# Altium PCB PCB1.PcbDoc (part 2 of 2)
Units mm, origin at the board's own origin, x right, y up, seen from the top; angles counter-clockwise.
Board outline 143.92 x 105.38 mm, 2 copper layers (Top Layer, Bottom Layer); 71 components, 60 nets, 252 pads, 1765 vias.
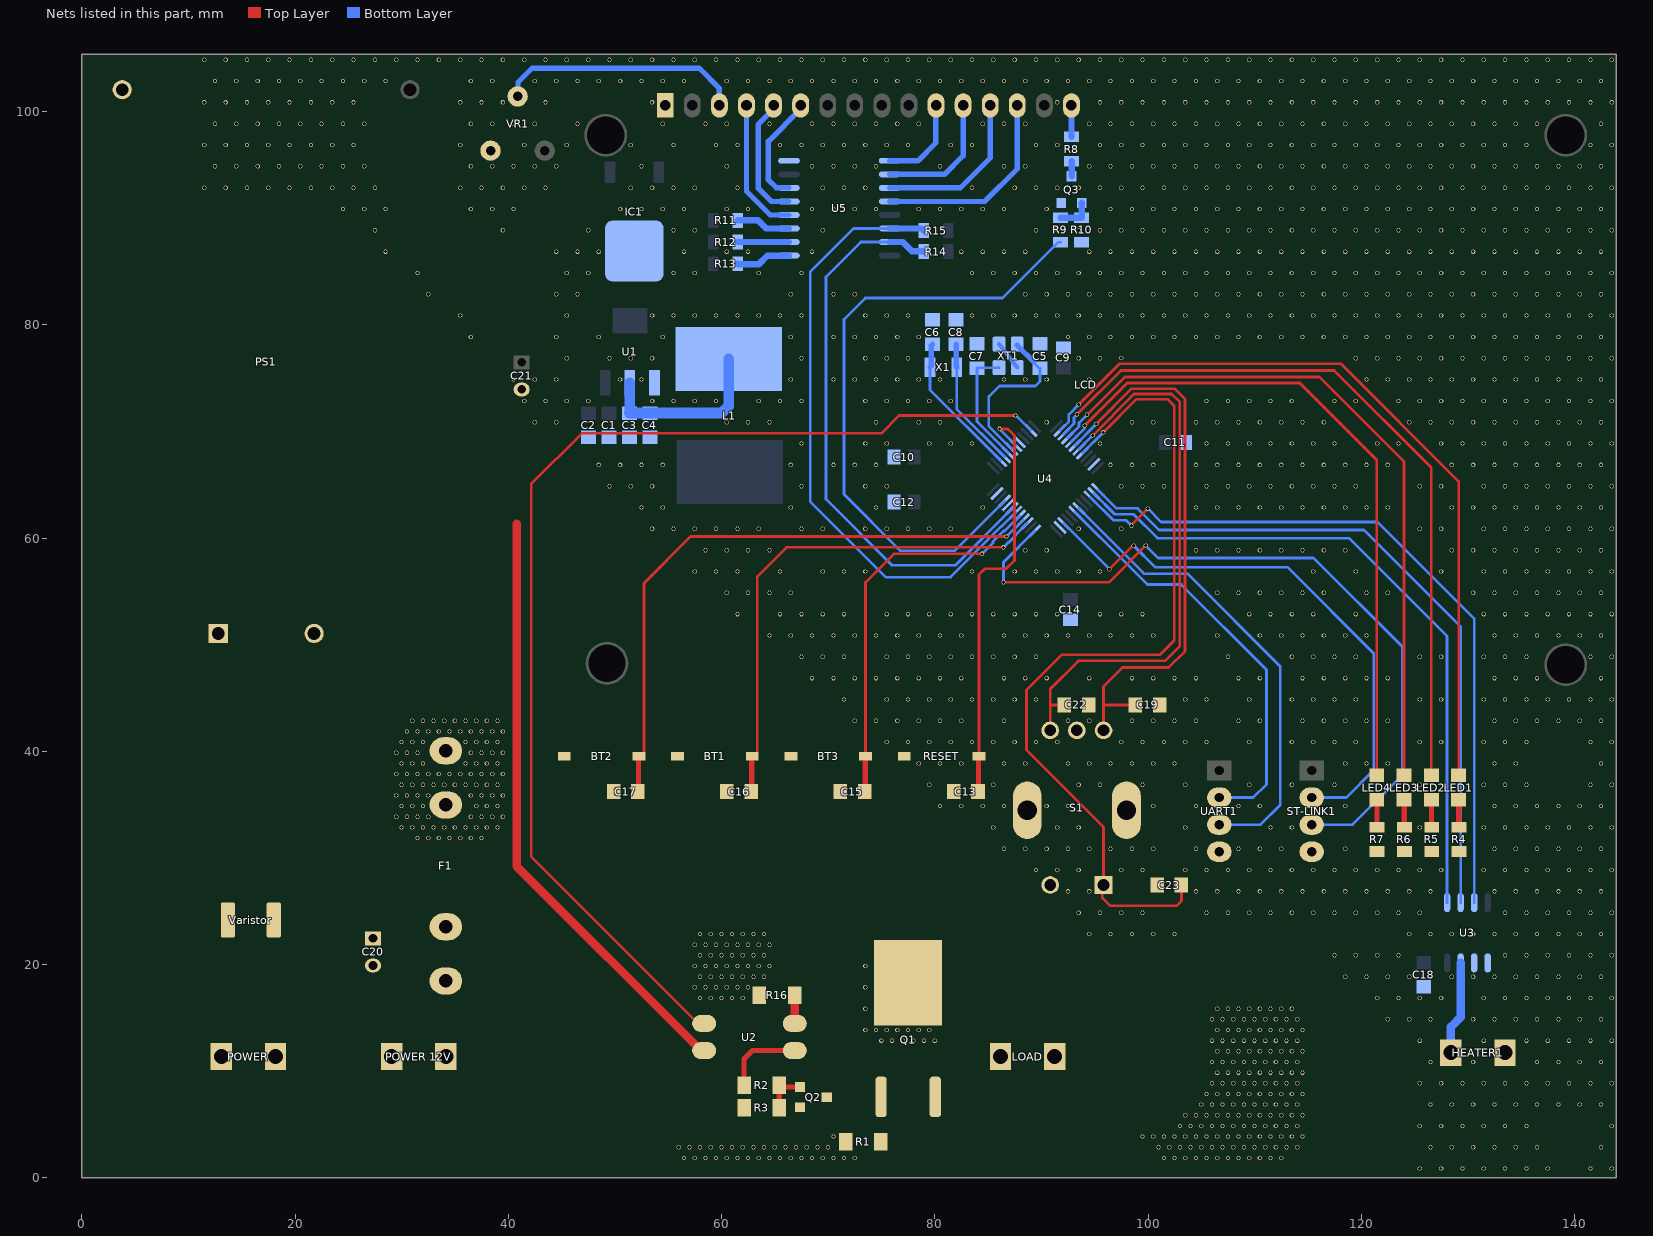
[diagram p2: the nets of this part, all layers, seen from the top]

## Via types
v1: diameter 0.4, hole 0.3, Top Layer to Bottom Layer, tented both sides, 1762 vias
v2: diameter 4, hole 3.5, Top Layer to Bottom Layer, 3 vias

## Nets (pads, with @x,y where several pads share a name; then routed paths per layer and width w, separated by ;. In a path a pad name is that pad's centre, name@x,y a point inside that pad or via, vN(x,y) a via of type N, cw(c..) or ccw(c..) an arc to the next point about the centre after c; other vN are vias at no path point) (continued)
GND: BT1.2 BT2.2 BT3.2 C1.2 C2.2 C3.2 C4.2 C5.2 C6.2 C7.2 C8.2 C9.1 C10.1 C11.1 C12.1 C13.1 C14.1 C15.1 C16.1 C17.1 C18.1 C19.2 C21.2 C22.2 C23.2 HEATER1.1 IC1.2 LCD.1 PS1.3 Q3.1 R4.2 R5.2 R6.2 R7.2 R10.1 RESET.2 S1.2 S1.C S1.S1 S1.S2 ST-LINK1.4 U1.1 U2.2 U3.1 U3.2 U4.8 U4.23 U4.35 U4.44 U4.47 U5.8 UART1.4 VR1.1 XT1.2 XT1.4 | length 56.8
  Top Layer w0.254: U2.2@58.064,11.938 U2.2@58.361,11.938
  Top Layer w0.8: 40.792,61.326 40.792,29.21 U2.2@58.064,11.938
  other v1: 125.483,0.867 127.483,0.867 129.483,0.867 131.483,0.867 133.483,0.867 135.483,0.867 137.483,0.867 141.483,0.867 143.483,0.867 126.483,2.867 128.483,2.867 130.483,2.867 132.483,2.867 134.483,2.867 136.483,2.867 142.483,2.867 125.483,4.867 127.483,4.867 129.483,4.867 131.483,4.867 133.483,4.867 135.483,4.867 143.483,4.867 126.483,6.867 128.483,6.867 130.483,6.867 132.483,6.867 134.483,6.867 136.483,6.867 138.483,6.867 140.483,6.867 142.483,6.867 125.483,8.867 127.483,8.867 129.483,8.867 131.483,8.867 133.483,8.867 135.483,8.867 137.483,8.867 139.483,8.867 141.483,8.867 143.483,8.867 126.483,10.867 130.483,10.867 136.483,10.867 138.483,10.867 140.483,10.867 142.483,10.867 125.483,12.867 131.483,12.867 135.483,12.867 137.483,12.867 139.483,12.867 141.483,12.867 143.483,12.867 122.483,14.867 124.483,14.867 126.483,14.867 130.483,14.867 132.483,14.867 134.483,14.867 136.483,14.867 138.483,14.867 140.483,14.867 142.483,14.867 121.483,16.867 123.483,16.867 125.483,16.867 127.483,16.867 131.483,16.867 133.483,16.867 135.483,16.867 137.483,16.867 139.483,16.867 141.483,16.867 143.483,16.867 118.483,18.867 120.483,18.867 122.483,18.867 124.483,18.867 128.483,18.867 130.483,18.867 132.483,18.867 134.483,18.867 136.483,18.867 138.483,18.867 140.483,18.867 142.483,18.867 117.483,20.867 119.483,20.867 121.483,20.867 123.483,20.867 133.483,20.867 135.483,20.867 137.483,20.867 139.483,20.867 141.483,20.867 143.483,20.867 94.483,22.867 96.483,22.867 98.483,22.867 100.483,22.867 102.483,22.867 124.483,22.867 126.483,22.867 128.483,22.867 130.483,22.867 132.483,22.867 134.483,22.867 136.483,22.867 138.483,22.867 140.483,22.867 142.483,22.867 93.483,24.867 95.483,24.867 97.483,24.867 99.483,24.867 105.483,24.867 107.483,24.867 109.483,24.867 111.483,24.867 113.483,24.867 115.483,24.867 117.483,24.867 119.483,24.867 121.483,24.867 123.483,24.867 125.483,24.867 133.483,24.867 135.483,24.867 137.483,24.867 139.483,24.867 141.483,24.867 143.483,24.867 92.483,26.867 94.483,26.867 104.483,26.867 106.483,26.867 108.483,26.867 110.483,26.867 112.483,26.867 114.483,26.867 116.483,26.867 118.483,26.867 120.483,26.867 122.483,26.867 124.483,26.867 126.483,26.867 132.483,26.867 134.483,26.867 136.483,26.867 138.483,26.867 140.483,26.867 142.483,26.867 89.483,28.867 91.483,28.867 93.483,28.867 97.483,28.867 99.483,28.867 103.483,28.867 105.483,28.867 107.483,28.867 109.483,28.867 111.483,28.867 113.483,28.867 115.483,28.867 117.483,28.867 119.483,28.867 121.483,28.867 123.483,28.867 125.483,28.867 127.483,28.867 131.483,28.867 133.483,28.867 135.483,28.867 137.483,28.867 139.483,28.867 141.483,28.867 143.483,28.867 86.483,30.867 88.483,30.867 90.483,30.867 92.483,30.867 94.483,30.867 96.483,30.867 98.483,30.867 100.483,30.867 104.483,30.867 108.483,30.867 110.483,30.867 112.483,30.867 118.483,30.867 132.483,30.867 134.483,30.867 136.483,30.867 138.483,30.867 140.483,30.867 142.483,30.867 85.483,32.867 91.483,32.867 93.483,32.867 103.483,32.867 111.483,32.867 113.483,32.867 125.483,32.867 131.483,32.867 133.483,32.867 135.483,32.867 137.483,32.867 139.483,32.867 141.483,32.867 143.483,32.867 80.483,34.867 82.483,34.867 84.483,34.867 86.483,34.867 90.483,34.867 92.483,34.867 100.483,34.867 104.483,34.867 108.483,34.867 110.483,34.867 118.483,34.867 132.483,34.867 134.483,34.867 136.483,34.867 138.483,34.867 140.483,34.867 142.483,34.867 79.483,36.867 85.483,36.867 93.483,36.867 95.483,36.867 99.483,36.867 103.483,36.867 109.483,36.867 113.483,36.867 117.483,36.867 125.483,36.867 131.483,36.867 133.483,36.867 135.483,36.867 141.483,36.867 143.483,36.867 78.483,38.867 80.483,38.867 82.483,38.867 86.483,38.867 88.483,38.867 92.483,38.867 94.483,38.867 96.483,38.867 98.483,38.867 100.483,38.867 102.483,38.867 118.483,38.867 120.483,38.867 122.483,38.867 132.483,38.867 134.483,38.867 142.483,38.867 75.483,40.867 77.483,40.867 79.483,40.867 81.483,40.867 83.483,40.867 85.483,40.867 87.483,40.867 89.483,40.867 91.483,40.867 97.483,40.867 99.483,40.867 101.483,40.867 103.483,40.867 105.483,40.867 109.483,40.867 113.483,40.867 115.483,40.867 117.483,40.867 119.483,40.867 125.483,40.867 127.483,40.867 131.483,40.867 133.483,40.867 135.483,40.867 141.483,40.867 143.483,40.867 72.483,42.867 74.483,42.867 76.483,42.867 78.483,42.867 80.483,42.867 82.483,42.867 86.483,42.867 92.483,42.867 94.483,42.867 98.483,42.867 100.483,42.867 102.483,42.867 104.483,42.867 108.483,42.867 110.483,42.867 114.483,42.867 116.483,42.867 118.483,42.867 120.483,42.867 122.483,42.867 132.483,42.867 134.483,42.867 136.483,42.867 138.483,42.867 140.483,42.867 142.483,42.867 71.483,44.867 75.483,44.867 77.483,44.867 79.483,44.867 81.483,44.867 83.483,44.867 85.483,44.867 87.483,44.867 89.483,44.867 103.483,44.867 105.483,44.867 109.483,44.867 113.483,44.867 115.483,44.867 117.483,44.867 119.483,44.867 125.483,44.867 127.483,44.867 131.483,44.867 133.483,44.867 135.483,44.867 137.483,44.867 139.483,44.867 141.483,44.867 143.483,44.867 68.483,46.867 70.483,46.867 72.483,46.867 74.483,46.867 76.483,46.867 78.483,46.867 80.483,46.867 82.483,46.867 86.483,46.867 88.483,46.867 90.483,46.867 94.483,46.867 98.483,46.867 100.483,46.867 102.483,46.867 104.483,46.867 108.483,46.867 110.483,46.867 114.483,46.867 116.483,46.867 118.483,46.867 120.483,46.867 122.483,46.867 132.483,46.867 134.483,46.867 136.483,46.867 142.483,46.867 67.483,48.867 69.483,48.867 71.483,48.867 75.483,48.867 77.483,48.867 79.483,48.867 81.483,48.867 83.483,48.867 85.483,48.867 87.483,48.867 89.483,48.867 107.483,48.867 113.483,48.867 115.483,48.867 117.483,48.867 119.483,48.867 125.483,48.867 127.483,48.867 131.483,48.867 133.483,48.867 135.483,48.867 141.483,48.867 143.483,48.867 64.483,50.867 66.483,50.867 68.483,50.867 70.483,50.867 72.483,50.867 74.483,50.867 76.483,50.867 78.483,50.867 80.483,50.867 82.483,50.867 86.483,50.867 88.483,50.867 90.483,50.867 92.483,50.867 94.483,50.867 96.483,50.867 98.483,50.867 100.483,50.867 106.483,50.867 110.483,50.867 112.483,50.867 114.483,50.867 116.483,50.867 118.483,50.867 120.483,50.867 132.483,50.867 134.483,50.867 136.483,50.867 138.483,50.867 140.483,50.867 142.483,50.867 61.483,52.867 65.483,52.867 67.483,52.867 69.483,52.867 71.483,52.867 75.483,52.867 77.483,52.867 79.483,52.867 81.483,52.867 83.483,52.867 85.483,52.867 87.483,52.867 89.483,52.867 91.483,52.867 95.483,52.867 97.483,52.867 99.483,52.867 109.483,52.867 111.483,52.867 113.483,52.867 115.483,52.867 119.483,52.867 131.483,52.867 133.483,52.867 135.483,52.867 137.483,52.867 139.483,52.867 141.483,52.867 143.483,52.867 60.483,54.867 62.483,54.867 64.483,54.867 66.483,54.867 106.483,54.867 108.483,54.867 110.483,54.867 112.483,54.867 114.483,54.867 116.483,54.867 120.483,54.867 122.483,54.867 130.483,54.867 132.483,54.867 134.483,54.867 136.483,54.867 138.483,54.867 140.483,54.867 142.483,54.867 57.483,56.867 59.483,56.867 61.483,56.867 65.483,56.867 69.483,56.867 71.483,56.867 73.483,56.867 83.483,56.867 87.483,56.867 89.483,56.867 91.483,56.867 93.483,56.867 95.483,56.867 115.483,56.867 119.483,56.867 127.483,56.867 131.483,56.867 133.483,56.867 135.483,56.867 137.483,56.867 139.483,56.867 141.483,56.867 143.483,56.867 58.483,58.867 60.483,58.867 62.483,58.867 64.483,58.867 88.483,58.867 90.483,58.867 104.483,58.867 106.483,58.867 108.483,58.867 110.483,58.867 112.483,58.867 114.483,58.867 116.483,58.867 118.483,58.867 128.483,58.867 130.483,58.867 132.483,58.867 134.483,58.867 136.483,58.867 138.483,58.867 140.483,58.867 142.483,58.867 53.483,60.867 55.483,60.867 57.483,60.867 59.483,60.867 61.483,60.867 63.483,60.867 67.483,60.867 69.483,60.867 73.483,60.867 75.483,60.867 77.483,60.867 79.483,60.867 81.483,60.867 93.483,60.867 97.483,60.867 125.483,60.867 127.483,60.867 131.483,60.867 133.483,60.867 135.483,60.867 137.483,60.867 139.483,60.867 141.483,60.867 143.483,60.867 52.483,62.867 54.483,62.867 66.483,62.867 74.483,62.867 84.483,62.867 104.483,62.867 106.483,62.867 108.483,62.867 110.483,62.867 112.483,62.867 114.483,62.867 116.483,62.867 118.483,62.867 120.483,62.867 122.483,62.867 128.483,62.867 130.483,62.867 132.483,62.867 134.483,62.867 136.483,62.867 138.483,62.867 140.483,62.867 142.483,62.867 49.483,64.867 51.483,64.867 53.483,64.867 67.483,64.867 73.483,64.867 75.483,64.867 97.483,64.867 99.483,64.867 101.483,64.867 105.483,64.867 107.483,64.867 109.483,64.867 111.483,64.867 113.483,64.867 115.483,64.867 117.483,64.867 119.483,64.867 125.483,64.867 127.483,64.867 131.483,64.867 133.483,64.867 135.483,64.867 137.483,64.867 139.483,64.867 141.483,64.867 143.483,64.867 48.483,66.867 50.483,66.867 52.483,66.867 54.483,66.867 66.483,66.867 70.483,66.867 72.483,66.867 74.483,66.867 96.483,66.867 98.483,66.867 100.483,66.867 104.483,66.867 106.483,66.867 108.483,66.867 110.483,66.867 112.483,66.867 114.483,66.867 116.483,66.867 118.483,66.867 120.483,66.867 122.483,66.867 128.483,66.867 130.483,66.867 132.483,66.867 134.483,66.867 136.483,66.867 138.483,66.867 140.483,66.867 142.483,66.867 67.483,68.867 73.483,68.867 75.483,68.867 79.483,68.867 81.483,68.867 83.483,68.867 95.483,68.867 105.483,68.867 107.483,68.867 109.483,68.867 111.483,68.867 113.483,68.867 115.483,68.867 117.483,68.867 121.483,68.867 123.483,68.867 127.483,68.867 129.483,68.867 131.483,68.867 133.483,68.867 135.483,68.867 137.483,68.867 139.483,68.867 141.483,68.867 143.483,68.867 42.483,70.867 44.483,70.867 60.483,70.867 62.483,70.867 64.483,70.867 74.483,70.867 78.483,70.867 80.483,70.867 90.483,70.867 98.483,70.867 100.483,70.867 104.483,70.867 106.483,70.867 108.483,70.867 110.483,70.867 112.483,70.867 114.483,70.867 116.483,70.867 124.483,70.867 126.483,70.867 128.483,70.867 130.483,70.867 132.483,70.867 134.483,70.867 136.483,70.867 138.483,70.867 140.483,70.867 142.483,70.867 41.483,72.867 43.483,72.867 45.483,72.867 47.483,72.867 53.483,72.867 55.483,72.867 57.483,72.867 59.483,72.867 63.483,72.867 65.483,72.867 67.483,72.867 73.483,72.867 75.483,72.867 77.483,72.867 79.483,72.867 81.483,72.867 105.483,72.867 107.483,72.867 109.483,72.867 111.483,72.867 113.483,72.867 117.483,72.867 119.483,72.867 123.483,72.867 125.483,72.867 127.483,72.867 129.483,72.867 131.483,72.867 133.483,72.867 135.483,72.867 137.483,72.867 139.483,72.867 141.483,72.867 143.483,72.867 40.483,74.867 42.483,74.867 44.483,74.867 50.483,74.867 52.483,74.867 66.483,74.867 70.483,74.867 72.483,74.867 74.483,74.867 76.483,74.867 78.483,74.867 80.483,74.867 86.483,74.867 88.483,74.867 90.483,74.867 94.483,74.867 120.483,74.867 122.483,74.867 124.483,74.867 126.483,74.867 128.483,74.867 130.483,74.867 132.483,74.867 134.483,74.867 136.483,74.867 138.483,74.867 140.483,74.867 142.483,74.867 45.483,76.867 49.483,76.867 51.483,76.867 53.483,76.867 67.483,76.867 73.483,76.867 75.483,76.867 77.483,76.867 93.483,76.867 95.483,76.867 119.483,76.867 121.483,76.867 123.483,76.867 125.483,76.867 127.483,76.867 129.483,76.867 131.483,76.867 133.483,76.867 135.483,76.867 137.483,76.867 139.483,76.867 141.483,76.867 143.483,76.867 97.483,76.889 36.483,78.867 44.483,78.867 48.483,78.867 54.483,78.867 66.483,78.867 70.483,78.867 72.483,78.867 74.483,78.867 76.483,78.867 78.483,78.867 92.483,78.867 94.483,78.867 96.483,78.867 98.483,78.867 100.483,78.867 102.483,78.867 104.483,78.867 106.483,78.867 108.483,78.867 110.483,78.867 112.483,78.867 114.483,78.867 116.483,78.867 118.483,78.867 120.483,78.867 122.483,78.867 124.483,78.867 126.483,78.867 128.483,78.867 130.483,78.867 132.483,78.867 134.483,78.867 136.483,78.867 138.483,78.867 140.483,78.867 142.483,78.867 35.483,80.867 45.483,80.867 53.483,80.867 55.483,80.867 57.483,80.867 59.483,80.867 61.483,80.867 63.483,80.867 65.483,80.867 67.483,80.867 73.483,80.867 75.483,80.867 77.483,80.867 83.483,80.867 85.483,80.867 87.483,80.867 89.483,80.867 91.483,80.867 93.483,80.867 95.483,80.867 97.483,80.867 99.483,80.867 101.483,80.867 103.483,80.867 105.483,80.867 107.483,80.867 109.483,80.867 111.483,80.867 113.483,80.867 115.483,80.867 117.483,80.867 119.483,80.867 121.483,80.867 123.483,80.867 125.483,80.867 127.483,80.867 129.483,80.867 131.483,80.867 133.483,80.867 135.483,80.867 137.483,80.867 139.483,80.867 141.483,80.867 143.483,80.867 32.483,82.867 44.483,82.867 46.483,82.867 66.483,82.867 70.483,82.867 72.483,82.867 88.483,82.867 90.483,82.867 92.483,82.867 94.483,82.867 96.483,82.867 98.483,82.867 100.483,82.867 102.483,82.867 104.483,82.867 106.483,82.867 108.483,82.867 110.483,82.867 112.483,82.867 114.483,82.867 116.483,82.867 118.483,82.867 120.483,82.867 122.483,82.867 124.483,82.867 126.483,82.867 128.483,82.867 130.483,82.867 132.483,82.867 134.483,82.867 136.483,82.867 138.483,82.867 140.483,82.867 142.483,82.867 31.483,84.867 45.483,84.867 47.483,84.867 55.483,84.867 57.483,84.867 63.483,84.867 67.483,84.867 83.483,84.867 85.483,84.867 87.483,84.867 89.483,84.867 91.483,84.867 93.483,84.867 95.483,84.867 97.483,84.867 99.483,84.867 101.483,84.867 103.483,84.867 105.483,84.867 107.483,84.867 109.483,84.867 111.483,84.867 113.483,84.867 115.483,84.867 117.483,84.867 119.483,84.867 121.483,84.867 123.483,84.867 125.483,84.867 127.483,84.867 129.483,84.867 131.483,84.867 133.483,84.867 135.483,84.867 137.483,84.867 139.483,84.867 141.483,84.867 143.483,84.867 28.483,86.867 44.483,86.867 46.483,86.867 48.483,86.867 56.483,86.867 60.483,86.867 62.483,86.867 68.483,86.867 82.483,86.867 84.483,86.867 86.483,86.867 88.483,86.867 94.483,86.867 96.483,86.867 98.483,86.867 100.483,86.867 102.483,86.867 104.483,86.867 106.483,86.867 108.483,86.867 110.483,86.867 112.483,86.867 114.483,86.867 116.483,86.867 118.483,86.867 120.483,86.867 122.483,86.867 124.483,86.867 126.483,86.867 128.483,86.867 130.483,86.867 132.483,86.867 134.483,86.867 136.483,86.867 138.483,86.867 140.483,86.867 142.483,86.867 27.483,88.867 39.483,88.867 47.483,88.867 55.483,88.867 57.483,88.867 69.483,88.867 89.483,88.867 91.483,88.867 93.483,88.867 95.483,88.867 97.483,88.867 99.483,88.867 101.483,88.867 103.483,88.867 105.483,88.867 107.483,88.867 109.483,88.867 111.483,88.867 113.483,88.867 115.483,88.867 117.483,88.867 119.483,88.867 121.483,88.867 123.483,88.867 125.483,88.867 127.483,88.867 129.483,88.867 131.483,88.867 133.483,88.867 135.483,88.867 137.483,88.867 139.483,88.867 141.483,88.867 143.483,88.867 24.483,90.867 26.483,90.867 28.483,90.867 36.483,90.867 38.483,90.867 40.483,90.867 50.483,90.867 52.483,90.867 54.483,90.867 56.483,90.867 60.483,90.867 62.483,90.867 68.483,90.867 70.483,90.867 72.483,90.867 74.483,90.867 78.483,90.867 80.483,90.867 82.483,90.867 84.483,90.867 86.483,90.867 90.483,90.867 96.483,90.867 98.483,90.867 100.483,90.867 102.483,90.867 104.483,90.867 106.483,90.867 108.483,90.867 110.483,90.867 112.483,90.867 114.483,90.867 116.483,90.867 118.483,90.867 120.483,90.867 122.483,90.867 124.483,90.867 126.483,90.867 128.483,90.867 130.483,90.867 132.483,90.867 134.483,90.867 136.483,90.867 138.483,90.867 140.483,90.867 142.483,90.867 11.483,92.867 13.483,92.867 15.483,92.867 17.483,92.867 19.483,92.867 21.483,92.867 23.483,92.867 25.483,92.867 27.483,92.867 35.483,92.867 37.483,92.867 39.483,92.867 41.483,92.867 43.483,92.867 51.483,92.867 53.483,92.867 55.483,92.867 57.483,92.867 61.483,92.867 69.483,92.867 71.483,92.867 73.483,92.867 83.483,92.867 87.483,92.867 89.483,92.867 91.483,92.867 93.483,92.867 95.483,92.867 97.483,92.867 99.483,92.867 101.483,92.867 103.483,92.867 105.483,92.867 107.483,92.867 109.483,92.867 111.483,92.867 113.483,92.867 115.483,92.867 117.483,92.867 119.483,92.867 121.483,92.867 123.483,92.867 125.483,92.867 127.483,92.867 129.483,92.867 131.483,92.867 133.483,92.867 135.483,92.867 137.483,92.867 139.483,92.867 141.483,92.867 143.483,92.867 12.483,94.867 14.483,94.867 16.483,94.867 18.483,94.867 20.483,94.867 22.483,94.867 24.483,94.867 26.483,94.867 36.483,94.867 38.483,94.867 40.483,94.867 42.483,94.867 44.483,94.867 52.483,94.867 60.483,94.867 68.483,94.867 70.483,94.867 72.483,94.867 74.483,94.867 80.483,94.867 86.483,94.867 88.483,94.867 94.483,94.867 96.483,94.867 98.483,94.867 100.483,94.867 102.483,94.867 104.483,94.867 106.483,94.867 108.483,94.867 110.483,94.867 112.483,94.867 114.483,94.867 116.483,94.867 118.483,94.867 120.483,94.867 122.483,94.867 124.483,94.867 126.483,94.867 128.483,94.867 130.483,94.867 132.483,94.867 134.483,94.867 136.483,94.867 138.483,94.867 140.483,94.867 142.483,94.867 11.483,96.867 13.483,96.867 15.483,96.867 17.483,96.867 19.483,96.867 21.483,96.867 23.483,96.867 25.483,96.867 35.483,96.867 41.483,96.867 45.483,96.867 51.483,96.867 55.483,96.867 59.483,96.867 61.483,96.867 65.483,96.867 67.483,96.867 69.483,96.867 71.483,96.867 73.483,96.867 75.483,96.867 77.483,96.867 81.483,96.867 83.483,96.867 89.483,96.867 91.483,96.867 95.483,96.867 97.483,96.867 99.483,96.867 101.483,96.867 103.483,96.867 105.483,96.867 107.483,96.867 109.483,96.867 111.483,96.867 113.483,96.867 115.483,96.867 117.483,96.867 119.483,96.867 121.483,96.867 123.483,96.867 125.483,96.867 127.483,96.867 129.483,96.867 131.483,96.867 133.483,96.867 135.483,96.867 141.483,96.867 143.483,96.867 12.483,98.867 14.483,98.867 16.483,98.867 18.483,98.867 20.483,98.867 22.483,98.867 24.483,98.867 26.483,98.867 36.483,98.867 38.483,98.867 40.483,98.867 42.483,98.867 46.483,98.867 54.483,98.867 58.483,98.867 60.483,98.867 64.483,98.867 68.483,98.867 70.483,98.867 72.483,98.867 74.483,98.867 76.483,98.867 78.483,98.867 84.483,98.867 86.483,98.867 88.483,98.867 94.483,98.867 96.483,98.867 98.483,98.867 100.483,98.867 102.483,98.867 104.483,98.867 106.483,98.867 108.483,98.867 110.483,98.867 112.483,98.867 114.483,98.867 116.483,98.867 118.483,98.867 120.483,98.867 122.483,98.867 124.483,98.867 126.483,98.867 128.483,98.867 130.483,98.867 132.483,98.867 134.483,98.867 136.483,98.867 142.483,98.867 11.483,100.867 13.483,100.867 15.483,100.867 17.483,100.867 19.483,100.867 21.483,100.867 23.483,100.867 25.483,100.867 35.483,100.867 37.483,100.867 39.483,100.867 43.483,100.867 53.483,100.867 91.483,100.867 95.483,100.867 97.483,100.867 99.483,100.867 101.483,100.867 103.483,100.867 105.483,100.867 107.483,100.867 109.483,100.867 111.483,100.867 113.483,100.867 115.483,100.867 117.483,100.867 119.483,100.867 121.483,100.867 123.483,100.867 125.483,100.867 127.483,100.867 129.483,100.867 131.483,100.867 133.483,100.867 135.483,100.867 137.483,100.867 139.483,100.867 141.483,100.867 143.483,100.867 12.483,102.867 14.483,102.867 16.483,102.867 18.483,102.867 20.483,102.867 22.483,102.867 24.483,102.867 26.483,102.867 28.483,102.867 36.483,102.867 38.483,102.867 42.483,102.867 44.483,102.867 46.483,102.867 48.483,102.867 50.483,102.867 52.483,102.867 54.483,102.867 56.483,102.867 60.483,102.867 62.483,102.867 64.483,102.867 66.483,102.867 68.483,102.867 70.483,102.867 72.483,102.867 74.483,102.867 76.483,102.867 78.483,102.867 80.483,102.867 82.483,102.867 84.483,102.867 86.483,102.867 88.483,102.867 90.483,102.867 92.483,102.867 94.483,102.867 96.483,102.867 98.483,102.867 100.483,102.867 102.483,102.867 104.483,102.867 106.483,102.867 108.483,102.867 110.483,102.867 112.483,102.867 114.483,102.867 116.483,102.867 118.483,102.867 120.483,102.867 122.483,102.867 124.483,102.867 126.483,102.867 128.483,102.867 130.483,102.867 132.483,102.867 134.483,102.867 136.483,102.867 138.483,102.867 140.483,102.867 142.483,102.867 11.483,104.867 13.483,104.867 15.483,104.867 17.483,104.867 19.483,104.867 21.483,104.867 23.483,104.867 25.483,104.867 27.483,104.867 29.483,104.867 31.483,104.867 33.483,104.867 35.483,104.867 37.483,104.867 39.483,104.867 41.483,104.867 43.483,104.867 45.483,104.867 47.483,104.867 49.483,104.867 51.483,104.867 53.483,104.867 55.483,104.867 57.483,104.867 59.483,104.867 61.483,104.867 63.483,104.867 65.483,104.867 67.483,104.867 69.483,104.867 71.483,104.867 73.483,104.867 75.483,104.867 77.483,104.867 79.483,104.867 81.483,104.867 83.483,104.867 85.483,104.867 87.483,104.867 89.483,104.867 91.483,104.867 93.483,104.867 95.483,104.867 97.483,104.867 99.483,104.867 101.483,104.867 103.483,104.867 105.483,104.867 107.483,104.867 109.483,104.867 111.483,104.867 113.483,104.867 115.483,104.867 117.483,104.867 119.483,104.867 121.483,104.867 123.483,104.867 125.483,104.867 127.483,104.867 129.483,104.867 131.483,104.867 133.483,104.867 135.483,104.867 137.483,104.867 139.483,104.867 141.483,104.867 143.483,104.867
GND_ISO: "POWER 12V.2" C20.2 LOAD.1 Q2.1 R3.2
L: POWER.1 PS1.1 Varistor.2
N: POWER.2 PS1.2 Varistor.1
NetBT1_1: BT1.1 C16.2 U4.39 | length 47.9
  Top Layer w0.254: BT1.1@62.873,39.522 63.073,39.522 63.346,39.795 63.346,56.387 66.091,59.131 v1(86.436,59.131)
  Top Layer w0.5: C16.2@62.785,36.22 62.829,36.264 62.829,39.479 BT1.1@62.873,39.522
  Bottom Layer w0.254: v1(86.436,59.131) 86.915,59.61 86.938,59.61 87.57,60.242 87.57,60.28 U4.39@88.655,61.364
NetBT2_1: BT2.1 C17.2 U4.40 | length 57.9
  Top Layer w0.254: BT2.1@52.243,39.522 52.443,39.522 52.716,39.795 52.716,55.764 57.099,60.147 v1(86.716,60.147)
  Top Layer w0.5: C17.2@52.155,36.22 52.199,36.264 52.199,39.479 BT2.1@52.243,39.522
  Bottom Layer w0.254: v1(86.716,60.147) 86.736,60.147 88.301,61.713 U4.40@88.301,61.718
NetBT3_1: BT3.1 C15.2 U4.41 | length 36.8
  Top Layer w0.254: BT3.1@73.504,39.522 73.504,55.851 76.174,58.521 v1(84.422,58.521)
  Top Layer w0.5: C15.2@73.416,36.22 73.46,36.264 73.46,39.479 BT3.1@73.504,39.522
  Bottom Layer w0.254: v1(84.422,58.521) 85.447,59.546 85.447,59.661 86.444,60.658 86.534,60.658 U4.41@87.948,62.071
NetC3_1: C3.1 C4.1 L1.2 U1.2 | length 16.8
  Bottom Layer w0.254: C3.1@51.364,71.73 C3.1@51.398,71.763
  Bottom Layer w1: C3.1@51.364,71.73 C4.1@53.281,71.73 59.995,71.73 60.657,72.392 L1.2@60.657,76.792 ; C3.1@51.398,71.763 U1.2@51.398,74.574
NetC5_1: C5.1 U4.6 XT1.3 | length 15.7
  Bottom Layer w0.254: U4.6@87.241,68.336 87.222,68.336 86.728,68.831 86.719,68.831 85.065,70.485 85.065,73.279 86.055,74.27 89.433,74.27 89.865,74.701 C5.1@89.865,75.921 89.802,75.921 89.294,76.429 C5.1@89.294,76.513 ; XT1.3@87.718,78.089 XT1.3@87.718,78.189
  Bottom Layer w0.5: XT1.3@87.718,78.089 C5.1@89.294,76.513
NetC6_1: C6.1 U4.3 X1.2 | length 13.7
  Bottom Layer w0.254: X1.2@79.547,76.022 79.547,73.908 U4.3@86.18,67.276
  Bottom Layer w0.5: X1.2@79.547,76.022 79.666,76.141 79.666,78.055 C6.1@79.784,78.173
NetC7_1: C7.1 U4.5 XT1.1 | length 11.3
  Bottom Layer w0.254: XT1.1@86.018,75.989 84.015,75.989 C7.1@83.947,75.921 83.947,70.923 U4.5@86.887,67.983
NetC8_1: C8.1 U4.4 X1.1 | length 12.4
  Bottom Layer w0.254: X1.1@82.047,76.022 82.047,72.115 U4.4@86.534,67.629
  Bottom Layer w0.5: C8.1@81.994,78.173 82.021,78.146 82.021,76.049 X1.1@82.047,76.022
NetC13_2: C13.2 RESET.1 U4.7 | length 39.9
  Top Layer w0.254: RESET.1@84.134,39.522 84.134,56.575 84.684,57.125 86.69,57.125 87.478,57.912 87.478,69.621 86.868,70.231 86.078,70.231 v1(86.067,70.242)
  Top Layer w0.5: C13.2@84.046,36.22 84.09,36.264 84.09,39.479 RESET.1@84.134,39.522
  Bottom Layer w0.254: v1(86.067,70.242) 86.067,70.219 U4.7@87.594,68.691
NetC19_1: C19.1 S1.A U4.18 | length 52.7
  Top Layer w0.254: v1(95.137,70.699) 98.453,74.016 102.489,74.016 103.454,73.05 103.454,49.378 101.93,47.854 97.612,47.854 95.82,46.061 95.82,44.298 ; S1.A@95.82,41.968 95.82,44.298 ; C19.1@98.806,44.348 95.87,44.348 95.82,44.298
  Bottom Layer w0.254: U4.18@93.152,68.69 93.152,68.702 95.137,70.687 v1(95.137,70.699)
NetC20_1: "POWER 12V.1" C20.1 F1.1
NetC22_1: C22.1 S1.B U4.19 | length 53.9
  Top Layer w0.254: S1.B@90.82,41.968 90.82,44.221 ; C22.1@92.126,44.348 90.947,44.348 90.82,44.221 ; v1(94.814,69.626) 98.695,73.508 102.21,73.508 102.972,72.746 102.972,49.86 101.6,48.489 93.472,48.489 90.82,45.836 90.82,44.221
  Bottom Layer w0.254: U4.19@93.506,68.336 94.786,69.617 94.805,69.617 v1(94.814,69.626)
NetC23_1: C23.1 S1.1 U4.20 | length 80.7
  Top Layer w0.254: v1(95.793,69.917) 98.901,73.025 101.803,73.025 102.464,72.365 102.464,50.419 101.092,49.047 91.897,49.047 88.595,45.745 88.595,40.116 95.82,32.892 S1.1@95.82,27.468 95.707,27.355 95.707,26.238 96.418,25.527 102.692,25.527 103.124,25.959 C23.1@103.124,27.457
  Bottom Layer w0.254: U4.20@93.859,67.983 v1(95.793,69.917)
NetHEATER1_2: HEATER1.2 U3.3 | length 8.8
  Bottom Layer w0.8: HEATER1.2@128.397,11.735 128.397,14.148 129.311,15.062 U3.3@129.311,20.162
NetLCD_3: LCD.3 VR1.2 | length 23.2
  Bottom Layer w0.5: VR1.2@40.869,101.422 40.907,101.46 40.907,102.756 42.215,104.064 57.912,104.064 59.792,102.184 LCD.3@59.792,100.584
NetLCD_4: LCD.4 U5.4 | length 13
  Bottom Layer w0.5: LCD.4@62.332,100.584 62.332,92.532 64.559,90.305 U5.4@66.316,90.305
NetLCD_5: LCD.5 U5.5 | length 11.8
  Bottom Layer w0.5: LCD.5@64.872,100.584 64.872,100.228 63.424,98.781 63.424,92.824 64.672,91.575 U5.5@66.316,91.575
NetLCD_6: LCD.6 U5.6 | length 10.5
  Bottom Layer w0.5: U5.6@66.316,92.845 66.307,92.855 65.53,92.855 65.522,92.862 65.126,92.862 64.389,93.599 64.389,97.206 67.412,100.228 LCD.6@67.412,100.584
NetLCD_11: LCD.11 U5.9 | length 8.6
  Bottom Layer w0.5: U5.9@75.766,95.385 78.418,95.385 80.086,97.053 80.086,100.559 LCD.11@80.112,100.584
NetLCD_12: LCD.12 U5.10 | length 12.3
  Bottom Layer w0.5: U5.10@75.766,94.115 80.907,94.115 82.652,95.86 LCD.12@82.652,100.584
NetLCD_13: LCD.13 U5.11 | length 15.5
  Bottom Layer w0.5: U5.11@75.766,92.845 82.38,92.845 85.192,95.656 LCD.13@85.192,100.584
NetLCD_14: LCD.14 U5.12 | length 19.2
  Bottom Layer w0.5: U5.12@75.766,91.575 84.666,91.575 87.732,94.64 LCD.14@87.732,100.584
NetLCD_16: LCD.16 R8.1 | length 3
  Bottom Layer w0.254: R8.1@92.812,97.652 R8.1@92.829,97.635
  Bottom Layer w0.6: R8.1@92.812,97.652 LCD.16@92.812,100.584
NetLED1_1: LED1.1 U4.14 | length 72.5
  Top Layer w0.254: v1(93.495,72.533) 97.314,76.352 118.085,76.352 129.129,65.308 LED1.1@129.129,37.747
  Bottom Layer w0.254: U4.14@91.738,70.104 91.741,70.104 92.561,70.923 92.561,71.599 v1(93.495,72.533)
NetLED1_2: LED1.2 R4.1 | length 2.6
  Top Layer w0.5: LED1.2@129.129,35.461 129.148,35.442 129.148,32.915 R4.1@129.167,32.896
NetLED2_1: LED2.1 U4.15 | length 69.9
  Top Layer w0.254: v1(93.334,71.613) 97.438,75.717 117.45,75.717 126.568,66.599 LED2.1@126.568,37.747
  Bottom Layer w0.254: U4.15@92.091,69.751 92.091,69.769 93.055,70.733 93.055,71.295 93.334,71.574 v1(93.334,71.613)
NetLED2_2: LED2.2 R5.1 | length 2.6
  Top Layer w0.5: LED2.2@126.568,35.461 126.587,35.442 126.587,32.915 R5.1@126.606,32.896
NetLED3_1: LED3.1 U4.16 | length 66.8
  Top Layer w0.254: v1(94.265,71.56) 97.813,75.108 116.078,75.108 124.007,67.179 LED3.1@124.007,37.747
  Bottom Layer w0.254: U4.16@92.445,69.397 93.519,70.471 93.519,70.814 v1(94.265,71.56)
NetLED3_2: LED3.2 R6.1 | length 2.6
  Top Layer w0.5: LED3.2@124.007,35.461 124.026,35.442 124.026,32.915 R6.1@124.045,32.896
NetLED4_1: LED4.1 U4.17 | length 63.7
  Top Layer w0.254: v1(94.056,70.561) 98.044,74.549 114.224,74.549 121.445,67.327 LED4.1@121.445,37.747
  Bottom Layer w0.254: U4.17@92.799,69.043 94.028,70.273 94.028,70.533 v1(94.056,70.561)
NetLED4_2: LED4.2 R7.1 | length 2.6
  Top Layer w0.5: LED4.2@121.445,35.461 121.464,35.442 121.464,32.915 R7.1@121.484,32.896
NetLOAD_2: LOAD.2 Q1.3
NetQ1_1: Q1.1 Q2.3 R1.2
NetQ2_2: Q2.2 R2.2 R3.1 | length 4.1
  Top Layer w0.5: R3.1@65.405,6.579 R2.2@65.405,8.687 65.573,8.519 Q2.2@67.355,8.519
NetQ3_2: Q3.2 R9.1 R10.2 | length 3.4
  Bottom Layer w0.6: R9.1@91.779,90.04 R10.2@93.769,90.04 Q3.2@93.769,91.437
NetQ3_3: Q3.3 R8.2 | length 1.4
  Bottom Layer w0.254: Q3.3@92.819,93.937 Q3.3@92.829,93.948
  Bottom Layer w0.6: Q3.3@92.829,93.948 R8.2@92.829,95.349
NetR2_1: R2.1 U2.3 | length 7.5
  Top Layer w0.5: R2.1@62.103,8.687 62.103,11.151 62.89,11.938 U2.3@66.861,11.938
NetR9_2: R9.2 U4.45 | length 58.9
  Bottom Layer w0.254: U4.45@86.534,63.486 81.849,58.801 76.784,58.801 71.476,64.11 71.476,80.518 73.482,82.525 86.351,82.525 91.581,87.754 R9.2@91.779,87.754
NetR11_2: R11.2 U5.3 | length 5.1
  Bottom Layer w0.6: R11.2@61.516,89.797 63.416,89.797 64.178,89.035 U5.3@66.316,89.035
NetR12_2: R12.2 U5.2 | length 4.8
  Bottom Layer w0.6: R12.2@61.516,87.765 U5.2@66.316,87.765
NetR13_2: R13.2 U5.1 | length 5.1
  Bottom Layer w0.6: R13.2@61.516,85.733 61.549,85.7 63.5,85.7 64.295,86.495 U5.1@66.316,86.495
NetR14_2: R14.2 U4.43 U5.15 | length 54
  Bottom Layer w0.254: U5.15@75.766,87.765 73.058,87.765 69.799,84.506 69.799,63.652 75.997,57.455 81.917,57.455 U4.43@87.241,62.778
  Bottom Layer w0.6: U5.15@75.766,87.765 76.979,87.765 77.826,86.919 78.915,86.919 R14.2@78.966,86.868
NetR15_2: R15.2 U4.42 U5.14 | length 58.7
  Bottom Layer w0.254: U5.14@75.766,89.035 72.373,89.035 68.301,84.963 68.301,63.424 75.387,56.337 81.467,56.337 86.251,61.122 86.291,61.122 U4.42@87.594,62.425
  Bottom Layer w0.6: U5.14@75.766,89.035 78.763,89.035 R15.2@78.966,88.832
NetR16_1: R16.1 U2.4 | length 2.6
  Top Layer w0.254: R16.1@66.853,17.12 R16.1@66.861,17.111
  Top Layer w0.8: U2.4@66.861,14.478 R16.1@66.861,17.111
NetST-LINK1_2: ST-LINK1.2 U4.34 | length 53.8
  Top Layer w0.254: v1(96.359,57.083) 98.551,59.275 98.645,59.275 v1(98.654,59.284)
  Bottom Layer w0.254: U4.34@92.091,61.364 92.091,61.35 v1(96.359,57.083) ; v1(98.654,59.284) 100.686,57.252 113.106,57.252 121.158,49.2 121.158,38.227 118.593,35.662 ST-LINK1.2@115.341,35.662
NetST-LINK1_3: ST-LINK1.3 U4.37 | length 71.3
  Top Layer w0.254: v1(86.436,55.855) 96.317,55.855 v1(99.771,59.309)
  Bottom Layer w0.254: v1(86.436,55.855) 86.436,57.731 U4.37@89.362,60.657 ; v1(99.771,59.309) 100.94,58.141 115.519,58.141 123.85,49.809 123.85,37.795 119.177,33.122 ST-LINK1.3@115.341,33.122
NetU2_1: U2.1 U4.11 | length 107.8
  Top Layer w0.254: U2.1@58.361,14.478 57.785,14.478 42.139,30.124 42.139,65.075 46.888,69.825 74.981,69.825 76.648,71.492 v1(87.569,71.492)
  Bottom Layer w0.254: v1(87.569,71.492) 87.578,71.483 87.629,71.483 U4.11@89.008,70.104
NetU3_5: U3.5 U4.26 | length 63.7
  Bottom Layer w0.254: U4.26@94.92,64.193 96.874,62.238 98.644,62.238 100.887,59.995 118.847,59.995 128.041,50.8 U3.5@128.041,25.812
NetU3_6: U3.6 U4.25 | length 65.2
  Bottom Layer w0.254: U4.25@95.273,64.546 97.031,62.789 99.009,62.789 101.041,60.757 120.244,60.757 129.311,51.689 U3.6@129.311,25.812
NetU3_7: U3.7 U4.27 | length 68.7
  Top Layer w0.254: v1(98.45,61.163) 98.45,61.239 v1(99.974,62.763)
  Bottom Layer w0.254: U4.27@94.566,63.839 96.734,61.671 97.942,61.671 v1(98.45,61.163) ; v1(99.974,62.763) 101.219,61.519 121.514,61.519 130.581,52.451 U3.7@130.581,25.812
NetU4_30: U4.30 UART1.3 | length 44.5
  Bottom Layer w0.254: U4.30@93.506,62.778 99.617,56.667 103.683,56.667 112.395,47.955 112.395,34.976 110.541,33.122 UART1.3@106.68,33.122
NetU4_31: U4.31 UART1.2 | length 39.7
  Bottom Layer w0.254: U4.31@93.152,62.425 97.919,57.658 99.926,55.651 103.099,55.651 111.1,47.65 111.1,36.906 109.855,35.662 UART1.2@106.68,35.662
VCC: F1.2 Q1.2 R1.1 R16.2
  other v1: 56.483,1.867 57.483,1.867 58.483,1.867 59.483,1.867 60.483,1.867 61.483,1.867 62.483,1.867 63.483,1.867 64.483,1.867 65.483,1.867 66.483,1.867 67.483,1.867 68.483,1.867 69.483,1.867 70.483,1.867 71.483,1.867 72.483,1.867 101.483,1.867 102.483,1.867 103.483,1.867 104.483,1.867 105.483,1.867 106.483,1.867 107.483,1.867 108.483,1.867 109.483,1.867 110.483,1.867 111.483,1.867 112.483,1.867 55.983,2.867 56.983,2.867 57.983,2.867 58.983,2.867 59.983,2.867 60.983,2.867 61.983,2.867 62.983,2.867 63.983,2.867 64.983,2.867 65.983,2.867 66.983,2.867 67.983,2.867 68.983,2.867 69.983,2.867 100.983,2.867 101.983,2.867 102.983,2.867 103.983,2.867 104.983,2.867 105.983,2.867 106.983,2.867 107.983,2.867 108.983,2.867 109.983,2.867 110.983,2.867 111.983,2.867 112.983,2.867 113.983,2.867 70.483,3.867 99.483,3.867 100.483,3.867 101.483,3.867 102.483,3.867 103.483,3.867 104.483,3.867 105.483,3.867 106.483,3.867 107.483,3.867 108.483,3.867 109.483,3.867 110.483,3.867 111.483,3.867 112.483,3.867 113.483,3.867 114.483,3.867 102.983,4.867 103.983,4.867 104.983,4.867 105.983,4.867 106.983,4.867 107.983,4.867 108.983,4.867 109.983,4.867 110.983,4.867 111.983,4.867 112.983,4.867 113.983,4.867 103.483,5.867 104.483,5.867 105.483,5.867 106.483,5.867 107.483,5.867 108.483,5.867 109.483,5.867 110.483,5.867 111.483,5.867 112.483,5.867 113.483,5.867 114.483,5.867 104.983,6.867 105.983,6.867 106.983,6.867 107.983,6.867 108.983,6.867 109.983,6.867 110.983,6.867 111.983,6.867 112.983,6.867 113.983,6.867 105.483,7.867 106.483,7.867 107.483,7.867 108.483,7.867 109.483,7.867 110.483,7.867 111.483,7.867 112.483,7.867 113.483,7.867 114.483,7.867 105.983,8.867 106.983,8.867 107.983,8.867 108.983,8.867 109.983,8.867 110.983,8.867 111.983,8.867 112.983,8.867 113.983,8.867 106.483,9.867 107.483,9.867 108.483,9.867 109.483,9.867 110.483,9.867 111.483,9.867 112.483,9.867 113.483,9.867 114.483,9.867 105.983,10.867 106.983,10.867 107.983,10.867 108.983,10.867 109.983,10.867 110.983,10.867 111.983,10.867 112.983,10.867 113.983,10.867 106.483,11.867 107.483,11.867 108.483,11.867 109.483,11.867 110.483,11.867 111.483,11.867 112.483,11.867 113.483,11.867 114.483,11.867 74.983,12.867 75.983,12.867 76.983,12.867 77.983,12.867 78.983,12.867 79.983,12.867 105.983,12.867 106.983,12.867 107.983,12.867 108.983,12.867 109.983,12.867 110.983,12.867 111.983,12.867 112.983,12.867 113.983,12.867 73.483,13.867 74.483,13.867 75.483,13.867 76.483,13.867 77.483,13.867 78.483,13.867 79.483,13.867 106.483,13.867 107.483,13.867 108.483,13.867 109.483,13.867 110.483,13.867 111.483,13.867 112.483,13.867 113.483,13.867 114.483,13.867 105.983,14.867 106.983,14.867 107.983,14.867 108.983,14.867 109.983,14.867 110.983,14.867 111.983,14.867 112.983,14.867 113.983,14.867 73.483,15.867 106.483,15.867 107.483,15.867 108.483,15.867 109.483,15.867 110.483,15.867 111.483,15.867 112.483,15.867 113.483,15.867 57.983,16.867 58.983,16.867 59.983,16.867 60.983,16.867 61.983,16.867 57.483,17.867 58.483,17.867 59.483,17.867 60.483,17.867 61.483,17.867 62.483,17.867 73.483,17.867 57.983,18.867 58.983,18.867 59.983,18.867 60.983,18.867 61.983,18.867 62.983,18.867 63.983,18.867 57.483,19.867 58.483,19.867 59.483,19.867 60.483,19.867 61.483,19.867 62.483,19.867 63.483,19.867 64.483,19.867 73.483,19.867 57.983,20.867 58.983,20.867 59.983,20.867 60.983,20.867 61.983,20.867 62.983,20.867 63.983,20.867 57.483,21.867 58.483,21.867 59.483,21.867 60.483,21.867 61.483,21.867 62.483,21.867 63.483,21.867 64.483,21.867 57.983,22.867 58.983,22.867 59.983,22.867 60.983,22.867 61.983,22.867 62.983,22.867 63.983,22.867 31.483,31.867 32.483,31.867 33.483,31.867 34.483,31.867 35.483,31.867 36.483,31.867 37.483,31.867 29.983,32.867 30.983,32.867 31.983,32.867 32.983,32.867 33.983,32.867 34.983,32.867 35.983,32.867 36.983,32.867 37.983,32.867 38.983,32.867 29.483,33.867 30.483,33.867 31.483,33.867 32.483,33.867 36.483,33.867 37.483,33.867 38.483,33.867 39.483,33.867 29.983,34.867 30.983,34.867 31.983,34.867 36.983,34.867 37.983,34.867 38.983,34.867 29.483,35.867 30.483,35.867 31.483,35.867 32.483,35.867 36.483,35.867 37.483,35.867 38.483,35.867 39.483,35.867 29.983,36.867 30.983,36.867 31.983,36.867 32.983,36.867 33.983,36.867 34.983,36.867 35.983,36.867 36.983,36.867 37.983,36.867 38.983,36.867 29.483,37.867 30.483,37.867 31.483,37.867 32.483,37.867 33.483,37.867 34.483,37.867 35.483,37.867 36.483,37.867 37.483,37.867 38.483,37.867 39.483,37.867 29.983,38.867 30.983,38.867 31.983,38.867 35.983,38.867 36.983,38.867 37.983,38.867 38.983,38.867 29.483,39.867 30.483,39.867 31.483,39.867 36.483,39.867 37.483,39.867 38.483,39.867 39.483,39.867 29.983,40.867 30.983,40.867 31.983,40.867 35.983,40.867 36.983,40.867 37.983,40.867 38.983,40.867 30.483,41.867 31.483,41.867 32.483,41.867 33.483,41.867 34.483,41.867 35.483,41.867 36.483,41.867 37.483,41.867 38.483,41.867 39.483,41.867 30.983,42.867 31.983,42.867 32.983,42.867 33.983,42.867 34.983,42.867 35.983,42.867 36.983,42.867 37.983,42.867 38.983,42.867
pads on no net: "LCD.Hole 0" IC1.0 LCD.7 LCD.8 LCD.9 LCD.10 U1.4 U3.8 U4.2 U4.10 U4.12 U4.13 U4.21 U4.22 U4.28 U4.29 U4.32 U4.33 U4.38 U4.46 U5.7 U5.13 XT1.0
copper on no net:
  other v2: 2.515,2.642 139.598,3.632 138.811,39.04

## Polygon pours and split planes (outlines as drawn)
GND on Bottom Layer "GND_L02_P001" (solid, remove dead copper, pour order 1): 1.524,105.408 1.524,98.069 10.601,88.992 23.089,88.992 93.711,21.869 116.154,21.869 116.154,8.966 125.603,-0.483 143.967,-0.483 143.967,105.41 143.942,105.435
GND on Top Layer "GND_L01_P000" (solid, remove dead copper, pour order 0): 11.227,105.461 11.227,91.389 23.139,91.389 40.411,74.117 40.411,42.418 49.2,33.63 83.058,33.63 96.114,20.574 116.002,20.574 124.841,11.735 124.841,-0.305 143.916,-0.305 143.942,-0.279 143.942,105.461

## Keep-outs
Keep-Out Layer:
  lines w0.254: -0.686,-0.635 -0.686,105.537 144.018,105.537 144.018,-0.635 -0.686,-0.635

## Other copper
Top Layer:
  region net L: 7.976,38.837 16.51,30.302 16.51,4.902 19.152,2.261 23.19,2.261 24.359,3.429 24.359,6.147 21.869,8.636 21.869,41.123 17.399,45.593 17.399,56.388 13.386,60.401 7.315,60.401 5.893,58.979 5.893,40.869
  region net N: 8.357,25.781 10.617,28.042 13.945,28.042 14.757,27.229 14.757,9.119 13.31,7.671 9.652,7.671 8.407,8.915
  region net VCC: 27.864,42.266 29.693,44.323 38.125,44.323 39.827,42.266 39.827,33.172 38.125,31.471 29.693,31.471 27.864,33.172
  region net GND_ISO: 31.14,10.82 33.579,8.382 60.274,8.382 62.205,6.452 62.205,4.724 27.203,4.724 24.232,7.696 24.232,10.5
  region net VCC: 57.201,16.662 57.683,16.18 64.287,16.18 64.948,16.84 64.948,25.121 66.37,26.543 71.577,26.543 72.873,25.248 72.873,14.046 74.625,12.294 79.908,12.294 83.998,16.383 83.998,29.21 81.636,31.572 81.534,31.471 60.046,31.471 57.201,28.626
  region net NetC20_1: 30.988,21.946 30.988,21.311 32.283,20.015 32.283,10.439 32.842,9.881 45.745,9.881 47.854,11.989 47.854,18.771 40.894,25.73 35.077,25.73
  region net GND_ISO: 23.19,19.17 24.722,20.726 30.023,20.726 31.579,19.17 31.725,9.449 30.023,7.188 24.722,7.188 23.19,8.865
  region net NetC20_1: 24.308,23.114 24.308,22.809 25.908,21.209 36.576,21.209 38.481,23.114 38.456,28.423 36.576,30.302 25.908,30.302 24.308,28.423
  region net VCC: 81.864,26.949 86.716,26.949 97.257,16.408 113.843,16.408 121.107,9.144 121.107,1.194 119.761,-0.152 103.099,-0.152 95.021,7.925 95.021,11.989 89.459,17.551 82.677,17.551
  region net GND_ISO: 60.96,7.01 61.468,7.518 62.992,7.518 63.348,7.163 63.348,5.105 66.904,5.105 66.904,7.112 67.158,7.366 67.691,7.366 68.25,6.807 68.25,5.004 67.386,4.14 61.976,4.14 60.96,5.156
  region net NetQ1_1: 69.825,9.296 69.063,8.534 69.063,6.858 70.358,5.563 74.981,5.563 74.981,9.322 74.93,9.373
  region net VCC: 51.029,3.226 61.214,3.226 68.961,3.226 70.536,4.801 72.238,4.801 72.898,4.14 72.898,1.321 71.628,0.051 53.848,0.051
  region net NetQ1_1: 73.433,9.5 74.295,10.719 75.895,10.719 76.911,9.703 76.911,1.448 75.641,0.178 74.397,0.178 73.433,1.142
  region net NetLOAD_2: 88.621,14.326 87.147,15.799 84.43,15.799 81.483,12.852 81.483,11.633 80.416,10.566 78.588,10.566 77.445,9.423 77.445,1.219 78.816,-0.152 87.147,-0.152 88.621,1.219
Bottom Layer:
  region net N: 16.256,51.359 16.256,52.451 19.025,55.22 25.58,55.22 27.661,53.139 27.661,51.41 15.646,39.395 15.646,7.518 13.31,5.182 7.163,5.182 2.565,9.779 2.565,19.964 11.151,28.55 11.151,43.397 16.263,48.51
  region net GND_ISO: 25.933,18.39 31.242,14.224 31.242,8.077 30.023,6.858 25.527,6.858 22.225,10.16 22.225,43.078 31.725,52.578 41.275,52.578 50.419,43.434 67.843,43.434 76.556,34.722 68.91,28.448 56.49,28.448 39.548,45.39 30.074,45.39 27.381,42.697 27.381,25.4 25.933,23.952
  region net +12: 27.534,100.914 30.455,103.835 32.944,103.835 34.823,101.956 34.823,91.288 39.624,86.487 39.624,81.94 37.465,79.781 29.083,88.163 29.083,94.412 27.559,95.936
  region net VCC: 58.09,21.539 40.208,39.421 40.208,42.342 38.811,43.739 31.623,43.739 29.286,41.402 29.286,32.868 34.493,27.661 36.373,27.661 48.798,15.235
  region net +5: 75.766,85.373 74.422,84.277 77.165,84.277 77.216,84.226
  region net 3.3: 90.245,69.493 86.309,65.557 90.373,61.493 94.426,65.547
  region net VCC: 45.872,18.11 48.031,18.11 53.137,23.216 71.222,23.216 82.245,12.192 82.245,7.43 84.849,4.826 102.108,4.826 105.385,8.103 105.385,19.075 106.705,20.396 113.182,20.396 114.859,18.72 114.859,3.15 112.624,0.914 56.617,0.914
  region net GND_ISO: 47.727,37.211 73.99,37.211 90.805,20.396 101.727,20.396 102.008,7.366 88.57,7.366 88.57,15.494 85.7,15.494 73.533,27.661 57.277,27.661
  region net +12: 47.879,95.072 48.311,95.504 50.317,95.504 50.952,94.869 50.952,92.431 48.819,90.297 46.66,90.297 43.586,87.224 43.586,75.717 37.77,75.717 37.414,76.073 37.414,86.182 45.771,94.539